# EAGLE board demeter_v23 (EAGLE 6.2)
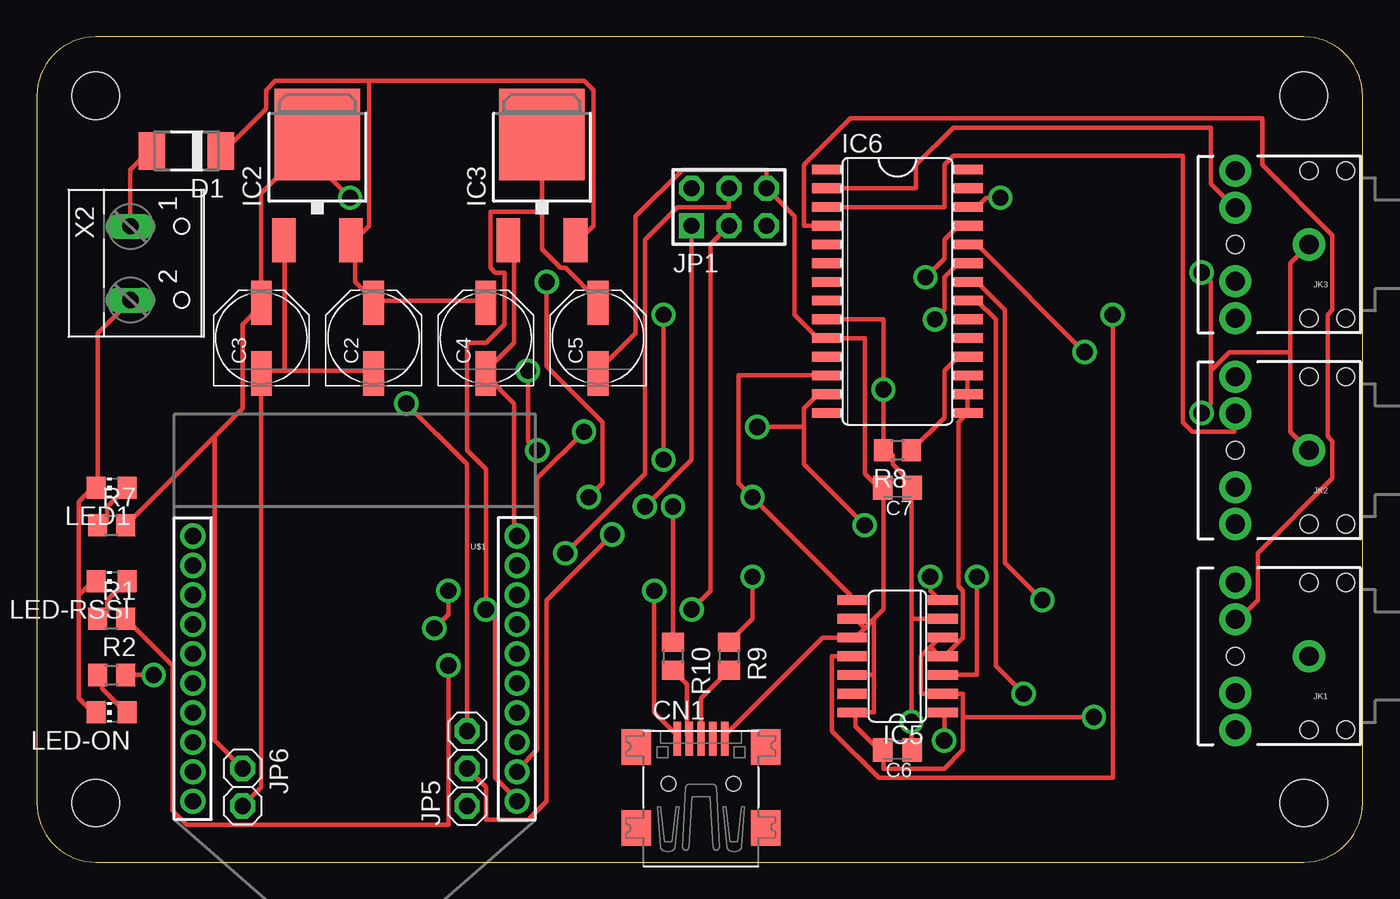
[diagram p0: board, top side]
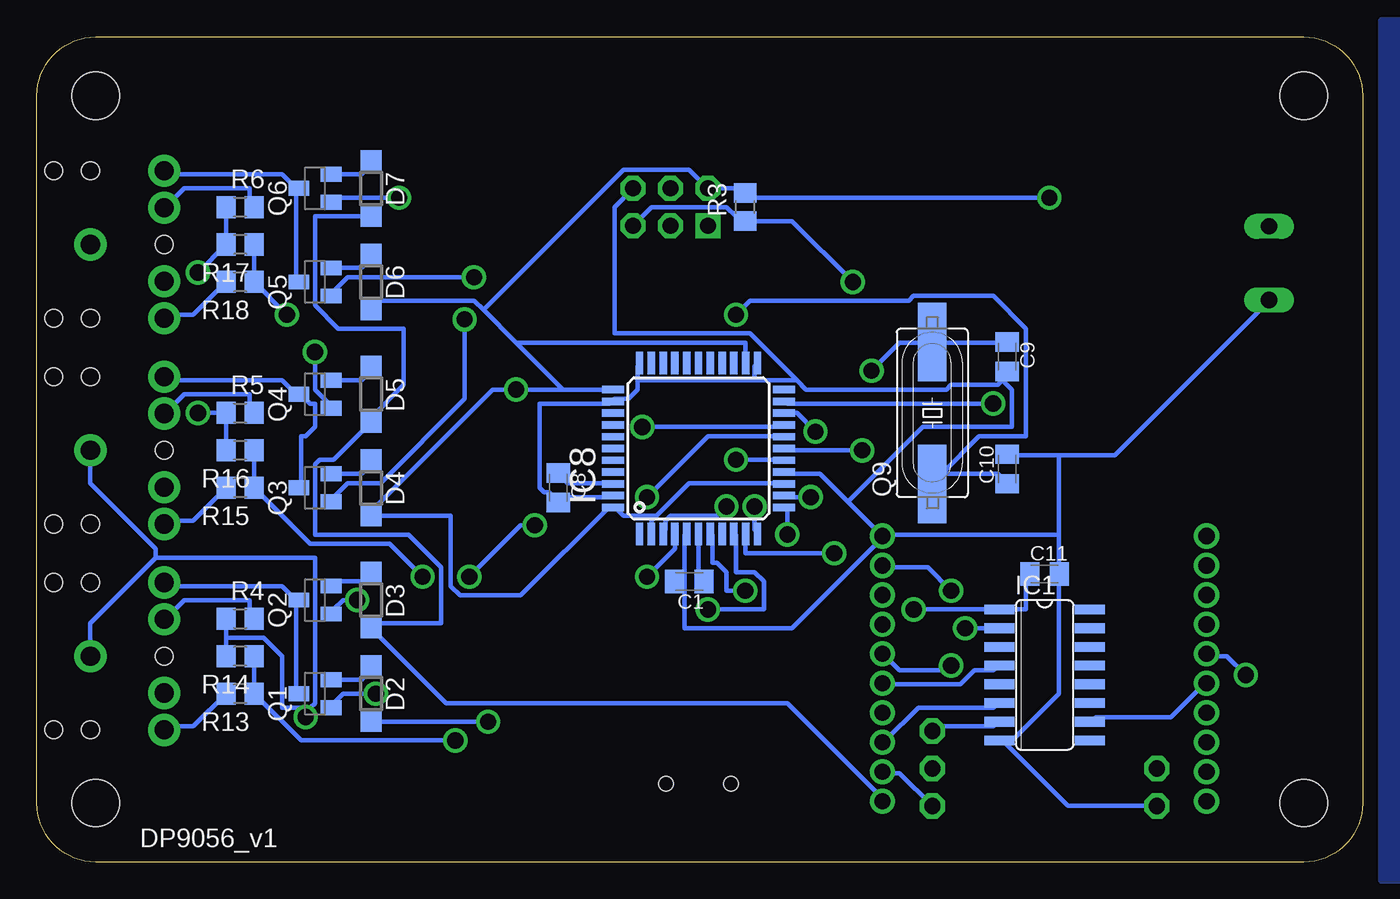
[diagram p1: board, bottom side, seen from below]

Size 90 x 56 mm. Coordinates in mm from the lower left corner, seen from the top.
Copper layers (1*16): Top 0.035mm / dielectric 1.5mm / Bottom 0.035mm
Design rules: minimum track width 12mil, minimum drill 1.1mm, track to track 8mil, track to pad 8mil, pad to pad 8mil, via to via 8mil, smd to smd 8mil, copper to edge 10mil, drill to drill 8mil, minimum pad ring 12mil, minimum via ring 10mil, stop-mask expansion 4mil, vias tented up to drill 25mil, thermal gap 10mil

## Footprints (pad centres in the part's own frame; a part is rotated, then mirrored left to right if it is on the bottom)
C0805K = smd 1.3 x 1.6: 1 -1,0; 2 1,0
PANASONIC_D = smd 3 x 1.4: + 2.4,0; - -2.4,0
USB-MINIB = smd 0.5 x 2.308: D+ 0,4.064; D- -0.8,4.064; GND 1.6,4.064; ID 0.8,4.064; VBUS -1.6,4.064 | smd 2 x 2.4: GND1 -4.4,-2; GND2 -4.4,3.5; GND3 4.4,3.5; GND4 4.4,-2 | hole 1: -2.2,1; 2.2,1
DO-214AC = smd 1.778 x 2.54: A 2.342,0; C -2.342,0
SOD123 = smd 1.4 x 1.4: A 1.9,0; C -1.9,0
SO16 = smd 0.66 x 2.032: 1 -4.445,-3.073; 2 -3.175,-3.073; 3 -1.905,-3.073; 4 -0.635,-3.073; 5 0.635,-3.073; 6 1.905,-3.073; 7 3.175,-3.073; 8 4.445,-3.073; 9 4.445,3.073; 10 3.175,3.073; 11 1.905,3.073; 12 0.635,3.073; 13 -0.635,3.073; 14 -1.905,3.073; 15 -3.175,3.073; 16 -4.445,3.073
DPACK = smd 1.6 x 3: 1 -2.28,-4.8; 3 2.28,-4.8 | smd 5.8 x 6.2: 4 0,2.38
SO14 = smd 2.032 x 0.66: 1 -3.073,3.81; 2 -3.073,2.54; 3 -3.073,1.27; 4 -3.073,0; 5 -3.073,-1.27; 6 -3.073,-2.54; 7 -3.073,-3.81; 8 3.073,-3.81; 9 3.073,-2.54; 10 3.073,-1.27; 11 3.073,0; 12 3.073,1.27; 13 3.073,2.54; 14 3.073,3.81
SO28W = smd 0.66 x 2.032: 1 -7.62,-4.78; 2 -6.35,-4.78; 3 -5.08,-4.78; 4 -3.81,-4.78; 5 -2.54,-4.78; 6 -1.27,-4.78; 7 0,-4.78; 8 1.27,-4.78; 9 2.54,-4.78; 10 3.81,-4.78; 11 5.08,-4.78; 12 6.35,-4.78; 13 7.62,-4.78; 14 8.89,-4.78; 15 8.89,4.78; 16 7.62,4.78; 17 6.35,4.78; 18 5.08,4.78; 19 3.81,4.78; 20 2.54,4.78; 21 1.27,4.78; 22 0,4.78; 23 -1.27,4.78; 24 -2.54,4.78; 25 -3.81,4.78; 26 -5.08,4.78; 27 -6.35,4.78; 28 -7.62,4.78
TQFP44 = smd 1.5 x 0.5: 1 -5.8,4; 2 -5.8,3.2; 3 -5.8,2.4; 4 -5.8,1.6; 5 -5.8,0.8; 6 -5.8,0; 7 -5.8,-0.8; 8 -5.8,-1.6; 9 -5.8,-2.4; 10 -5.8,-3.2; 11 -5.8,-4; 23 5.8,-4; 24 5.8,-3.2; 25 5.8,-2.4; 26 5.8,-1.6; 27 5.8,-0.8; 28 5.8,0; 29 5.8,0.8; 30 5.8,1.6; 31 5.8,2.4; 32 5.8,3.2; 33 5.8,4 | smd 0.5 x 1.5: 12 -4,-5.8; 13 -3.2,-5.8; 14 -2.4,-5.8; 15 -1.6,-5.8; 16 -0.8,-5.8; 17 0,-5.8; 18 0.8,-5.8; 19 1.6,-5.8; 20 2.4,-5.8; 21 3.2,-5.8; 22 4,-5.8; 34 4,5.8; 35 3.2,5.8; 36 2.4,5.8; 37 1.6,5.8; 38 0.8,5.8; 39 0,5.8; 40 -0.8,5.8; 41 -1.6,5.8; 42 -2.4,5.8; 43 -3.2,5.8; 44 -4,5.8
AUDIO-JACK = drill 1.3 pad 2.184: RING 5,5; RSH 5,2.5; SLEEVE 0,0; TIP 5,-5; TSH 5,-2.5 | hole 1.2: 0,5; -2.5,5; -2.5,-5; 0,-5; 5,0
AVR-ISP-6 = drill 1.1 square: 1 -2.54,-1.27 | drill 1.1 octagon: 2 -2.54,1.27; 3 0,-1.27; 4 0,1.27; 5 2.54,-1.27; 6 2.54,1.27
1X03 = drill 1.1 octagon: 1 -2.54,0; 2 0,0; 3 2.54,0
1X02 = drill 1.1 octagon: 1 -1.27,0; 2 1.27,0
CHIP-LED0805 = smd 1.5 x 1.3: A 0,-1.05; C 0,1.05
SOT23 = smd 1 x 1.4: 1 -0.95,-1.1; 2 0.95,-1.1; 3 0,1.1
HC49UP = smd 5.334 x 1.93: 1 -4.826,0; 2 4.826,0
R0805 = smd 1.3 x 1.5: 1 -0.95,0; 2 0.95,0
XBEE-1 = drill 1.1: 1 -11,20; 2 -11,18; 3 -11,16; 4 -11,14; 5 -11,12; 6 -11,10; 7 -11,8; 8 -11,6; 9 -11,4; 10 -11,2; 11 11,2; 12 11,4; 13 11,6; 14 11,8; 15 11,10; 16 11,12; 17 11,14; 18 11,16; 19 11,18; 20 11,20
DP9056_V1 = hole 3.2: 4,4; 86,4; 86,52; 4,52
W237-102 = drill 1.1 long: 1 -2.5,-1.27; 2 2.5,-1.27

## Placement (x,y rotation side)
C1  1uF  [C0805K]  45.72,19.05 180 bottom
C2  22uF  [PANASONIC_D]  22.86,35.56 90 top
C3  100uF  [PANASONIC_D]  15.24,35.56 90 top
C4  22uF  [PANASONIC_D]  30.48,35.56 90 top
C5  100uF  [PANASONIC_D]  38.1,35.56 90 top
C6  100nF  [C0805K]  58.42,7.62 180 top
C7  100nF  [C0805K]  58.42,25.4 180 top
C8  100nF  [C0805K]  54.61,25.4 270 bottom
C9  22pF  [C0805K]  24.13,34.29 270 bottom
C10  22pF  [C0805K]  24.13,26.67 90 bottom
C11  100nF  [C0805K]  21.59,19.56 0 bottom
CN1  [USB-MINIB]  45.08,4.32 0 top
D1  S1M  [DO-214AC]  10.16,48.26 180 top
D2  [SOD123]  67.31,11.43 270 bottom
D3  [SOD123]  67.31,17.78 270 bottom
D4  [SOD123]  67.31,25.4 270 bottom
D5  [SOD123]  67.31,31.75 270 bottom
D6  [SOD123]  67.31,39.37 270 bottom
D7  [SOD123]  67.31,45.72 270 bottom
IC1  4050  [SO16]  21.59,12.7 270 bottom
IC2  LM1117-5.0  [DPACK]  19.05,46.99 0 top
IC3  LM1117-3.3  [DPACK]  34.29,46.99 0 top
IC5  MCP3424  [SO14]  58.42,13.97 180 top
IC6  MCP23017SO  [SO28W]  58.42,39.37 270 top
IC8  ATMEGA32U4-AU  [TQFP44]  45.08,28.07 90 bottom
JK1  [AUDIO-JACK]  86.36,13.97 180 top
JK2  [AUDIO-JACK]  86.36,27.94 180 top
JK3  [AUDIO-JACK]  86.36,41.91 180 top
JP1  AVR-ISP-6  [AVR-ISP-6]  46.99,44.45 0 top
JP5  [1X03]  29.21,6.35 90 top
JP6  [1X02]  13.97,5.08 270 top
LED1  [CHIP-LED0805]  5.08,25.4 90 top
LED-ON  [CHIP-LED0805]  5.08,10.16 90 top
LED-RSSI  [CHIP-LED0805]  5.08,19.05 90 top
Q1  IRLML6402  [SOT23]  71.12,11.43 90 bottom
Q2  [SOT23]  71.12,17.78 90 bottom
Q3  IRLML6402  [SOT23]  71.12,25.4 90 bottom
Q4  [SOT23]  71.12,31.75 90 bottom
Q5  IRLML6402  [SOT23]  71.12,39.37 90 bottom
Q6  [SOT23]  71.12,45.72 90 bottom
Q9  [HC49UP]  29.21,30.48 90 bottom
R1  [R0805]  5.08,16.51 0 top
R2  [R0805]  5.08,12.7 0 top
R3  [R0805]  41.91,44.45 90 bottom
R4  [R0805]  76.2,16.51 0 bottom
R5  [R0805]  76.2,30.48 0 bottom
R6  [R0805]  76.2,44.45 0 bottom
R7  [R0805]  5.08,22.86 0 top
R8  [R0805]  58.42,27.94 180 top
R9  22  [R0805]  46.99,13.97 270 top
R10  22  [R0805]  43.18,13.97 270 top
R13  [R0805]  76.2,11.43 180 bottom
R14  [R0805]  76.2,13.97 180 bottom
R15  [R0805]  76.2,25.4 180 bottom
R16  [R0805]  76.2,27.94 180 bottom
R17  [R0805]  76.2,41.91 180 bottom
R18  [R0805]  76.2,39.37 180 bottom
U$1  XBEE-1B1  [XBEE-1]  21.59,24.13 180 top
U$6  [DP9056_V1]  0,0 0 top
X2  [W237-102]  7.62,40.64 270 top

## Library data of the parts
C1-C11 CN1 D1-D7 IC1-IC3 IC8 JK1-JK3 JP1 JP5 JP6 LED1 LED-ON LED-RSSI Q1-Q6 Q9 R1-R10 R13-R18 U$1 U$6 X2 = mark_2
IC5 = mark_2; MPN: MCP3424-E/SL; OC_FARNELL: 1630424; OC_NEWARK: 54M4871; PACKAGE: SOIC-14; SUPPLIER: Microchip
IC6 = mark_2; MF: MICROCHIP; MPN: MCP23017-E/SO; OC_FARNELL: 1332087; OC_NEWARK: 31K2958

## Nets
+3V3: C5.+ C11.1 D3.A D5.A D7.A IC1.1 IC3.4 U$1.1
+5V: C3.+ C6.1 C7.1 D2.A D4.A D6.A IC2.4 IC5.6 IC6.9 IC8.2 IC8.14 IC8.24 IC8.34 IC8.44 JP1.2 JP6.1 R3.2 R7.2 R8.2
+12V: C2.+ C4.+ D1.C IC2.3 IC3.3
CH1: IC5.1 R13.1 R14.1
CH2: IC5.3 R15.1 R16.1
CH3: IC5.11 R17.1 R18.1
CH4: IC5.13
CTS: U$1.12
D+: IC8.4 R9.1
D-: IC8.3 R10.1
DTR: IC1.3
EN: IC8.12 JP5.2
EN1-3: IC6.22 Q2.1
EN1-5: IC6.21 Q1.1
EN2-3: IC6.24 Q4.1
EN2-5: IC6.23 Q3.1
EN3-3: IC6.26 Q6.1
EN3-5: IC6.25 Q5.1
GND: C1.2 C2.- C3.- C4.- C5.- C6.2 C7.2 C8.2 C9.2 C10.2 C11.2 CN1.GND IC1.8 IC2.1 IC3.1 IC5.2 IC5.4 IC5.5 IC5.9 IC5.10 IC5.12 IC5.14 IC6.10 IC6.15 IC6.16 IC6.17 IC8.5 IC8.15 IC8.23 IC8.33 IC8.35 IC8.43 JK1.SLEEVE JK2.SLEEVE JK3.SLEEVE JP1.6 JP6.2 LED1.C LED-ON.C LED-RSSI.C R4.1 R5.1 R6.1 R14.2 R16.2 R17.2 U$1.10 X2.2
MISO: IC8.11 JP1.1
MOSI: IC8.10 JP1.4
N$1: D1.A X2.1
N$2: LED1.A R7.1
N$3: IC1.6 U$1.3
N$4: IC1.4 U$1.5
N$6: LED-RSSI.A R1.1
N$7: IC1.2 U$1.9
N$8: IC1.10 U$1.16
N$9: LED-ON.A R2.1
N$10: R2.2 U$1.15
N$11: IC6.18 R8.1
N$12: JK1.TIP Q1.3 Q2.3
N$13: D2.C Q1.2
N$14: D3.C Q2.2
N$15: JK2.TIP Q3.3 Q4.3
N$16: D4.C Q3.2
N$17: D5.C Q4.2
N$18: JK3.TIP Q5.3 Q6.3
N$19: D6.C Q5.2
N$20: D7.C Q6.2
N$24: C1.1 IC8.6
N$25: C8.1 IC8.42
N$26: C9.1 IC8.17 Q9.2
N$27: C10.1 IC8.16 Q9.1
N$28: CN1.D+ R9.2
N$29: CN1.D- R10.2
N$30: JK1.RING R13.2
N$32: JK2.RING R15.2
N$34: JK3.RING R18.2
RESET: IC1.5
RSSI: R1.2 U$1.6
RST: IC8.13 JP1.5 R3.1
RTS: IC1.9
RX: IC8.20 JP5.1 U$1.2
SCK: IC8.9 JP1.3
SCL: IC5.8 IC6.12 IC8.18
SDA: IC5.7 IC6.13 IC8.19
SN1: IC6.4 JK1.TSH R4.2
SN2: IC6.3 JK2.TSH R5.2
SN3: IC6.2 JK3.TSH R6.2
TX: IC1.7 IC8.21 JP5.3
VBUS: CN1.VBUS IC8.7

## Tracks (layer width: path | path; a pad name or v marks a point on that pad's centre or on a via)
+3V3  (via drill 1.1)
  Top 0.305: IC3.4 34.29,44.13 | 34.29,44.13 34.29,41.59 35.56,40.32 35.88,40.32 38.1,38.1 C5.+ | U$1.1 32.38,4.45 31.11,5.71 31.11,16.51 v30.48,17.14 30.48,26.67 29.21,27.94 29.21,35.24 30.48,35.24 31.75,36.51 31.75,40 31.11,40 30.8,40.32 30.8,44.13 34.29,44.13
  Bottom 0.305: D7.A 71.12,43.81 71.12,37.78 69.53,36.2 65.09,36.2 65.09,32.38 67.31,30.16 D5.A 69.85,27.3 70.8,27.3 71.12,26.99 71.12,22.23 64.77,22.23 62.55,20 62.55,16.19 67.31,16.19 D3.A 62.23,10.79 39.05,10.79 32.7,4.45 U$1.1 | C11.1 22.86,19.37 22.86,17.14 IC1.1 v30.48,17.14
+5V  (via drill 1.1)
  Top 0.305: 12.07,28.89 13.97,30.8 13.97,36.51 15.24,37.78 C3.+ 15.24,45.4 18.1,48.26 | 12.07,28.89 R7.2 | JP6.1 12.07,8.26 12.07,28.89 | 18.1,48.26 19.05,49.21 IC2.4 18.1,48.26 | C6.1 59.37,7.62 v59.37,9.53 59.37,16.51 | 59.37,16.51 IC5.6 | 59.37,25.4 59.37,25.72 58.1,26.99 58.1,27.62 57.78,27.94 R8.2 v57.47,32.07 57.47,36.83 IC6.9 | 59.37,25.4 59.37,16.51 | 59.37,25.4 C7.1 | v21.27,45.08 18.1,48.26
  Bottom 0.305: v59.37,9.53 D2.A | 47.94,23.5 48.26,23.18 48.26,22.54 IC8.2 | 47.94,23.5 45.72,25.72 39.37,25.72 IC8.14 | 47.94,23.5 50.16,23.5 50.8,24.13 IC8.44 51.12,24.13 57.15,18.1 61.28,18.1 61.91,18.73 61.91,23.5 D4.A 67.31,23.81 59.05,32.07 v57.47,32.07 54.29,32.07 | 54.29,32.07 51.12,32.07 IC8.34 | 54.29,32.07 57.47,35.24 | 57.47,35.24 59.69,37.46 | 59.69,37.46 60.32,38.1 66.99,38.1 67.31,37.78 D6.A | 57.47,35.24 41.91,35.24 41.91,33.97 IC8.24 | 59.69,37.46 50.16,46.99 45.72,46.99 JP1.2 42.23,45.72 R3.2 41.91,45.08 v21.27,45.08
+12V
  Top 0.305: 22.54,53.02 16.19,53.02 15.56,52.39 15.56,51.12 12.7,48.26 D1.C | 22.54,53.02 22.54,43.18 21.59,42.23 IC2.3 21.59,41.91 21.59,39.37 22.86,38.1 | 22.86,38.1 30.48,38.1 C4.+ | 22.86,38.1 C2.+ | 22.54,53.02 37.15,53.02 37.78,52.39 37.78,43.18 36.83,42.23 IC3.3
CH1  (via drill 1.1)
  Top 0.305: v61.59,8.26 61.59,10.16 IC5.1
  Bottom 0.305: R13.1 R14.1 | v61.59,8.26 72.07,8.26 R13.1 | R13.1
CH2  (via drill 1.1)
  Top 0.305: IC5.3 63.82,12.7 v63.82,19.37
  Bottom 0.305: R15.1 R16.1 | v63.82,19.37 66.04,21.59 71.44,21.59 R15.1 | R15.1
CH3  (via drill 1.1)
  Top 0.305: IC5.11 53.97,13.97 53.97,8.89 57.15,5.71 73.03,5.71 v73.03,37.15
  Bottom 0.305: R18.1 R17.1 | R18.1 v73.03,37.15 | R18.1
D+  (via drill 1.1)
  Top 0.305: v48.58,19.37 48.58,16.51 R9.1
  Bottom 0.305: v48.58,19.37 46.67,21.27 46.67,22.23 IC8.4
D-  (via drill 1.1)
  Top 0.305: v43.18,24.13 R10.1
  Bottom 0.305: v43.18,24.13 43.81,23.5 46.99,23.5 47.31,23.18 47.31,22.54 IC8.3
EN  (via drill 1.1)
  Top 0.305: v39.05,22.23 34.61,17.78 34.61,4.13 33.34,2.86 30.48,2.86 30.48,5.08 JP5.2
  Bottom 0.305: v39.05,22.23 39.05,24.13 IC8.12
EN1-3  (via drill 1.1)
  Top 0.305: v68.26,17.78 65.72,20.32 65.72,37.46 63.82,39.37 IC6.22
  Bottom 0.305: v68.26,17.78 69.22,17.78 69.85,17.14 Q2.1
EN1-5  (via drill 1.1)
  Top 0.305: v66.99,11.43 65.09,13.34 65.09,36.83 63.82,38.1 IC6.21
  Bottom 0.305: v66.99,11.43 69.22,11.43 69.85,10.79 Q1.1
EN2-3  (via drill 1.1)
  Top 0.305: v71.12,34.61 63.82,41.91 IC6.24
  Bottom 0.305: v71.12,34.61 71.12,32.07 70.17,31.11 Q4.1
EN2-5  (via drill 1.1)
  Top 0.305: v60.96,36.83 61.59,37.46 61.59,39.69 62.55,40.64 IC6.23
  Bottom 0.305: v60.96,36.83 60.96,31.43 66.67,25.72 68.9,25.72 69.85,24.77 Q3.1
EN3-3  (via drill 1.1)
  Top 0.305: v65.41,45.08 64.45,45.08 63.82,44.45 IC6.26
  Bottom 0.305: v65.41,45.08 69.85,45.08 Q6.1
EN3-5  (via drill 1.1)
  Top 0.305: v60.32,39.69 61.59,40.96 61.59,42.23 62.55,43.18 IC6.25
  Bottom 0.305: v60.32,39.69 68.9,39.69 69.85,38.73 Q5.1
GND  (via drill 1.1)
  Top 0.305: v79.06,30.48 79.69,31.11 79.69,33.34 | 79.69,33.34 80.96,34.61 85.09,34.61 | 85.09,34.61 85.09,29.21 JK2.SLEEVE | v79.06,40 79.69,39.37 79.69,33.34 | JK3.SLEEVE 85.09,40.64 85.09,34.61 | C5.- 38.1,33.34 40.64,35.88 40.64,43.81 43.81,46.99 49.53,46.99 JP1.6 51.43,43.81 51.43,37.15 53.02,35.56 IC6.10 56.2,35.56 56.2,26.35 57.15,25.4 C7.2 57.47,25.4 57.47,17.14 56.83,16.51 | 63.18,31.75 63.18,30.48 | 63.18,31.75 63.18,33.02 IC6.17 | 63.18,31.75 IC6.16 | 60.64,14.61 61.28,15.24 IC5.5 | 60.64,14.61 60.01,13.97 60.01,11.43 IC5.2 62.87,11.43 62.87,9.84 | 60.64,14.61 61.28,13.97 IC5.4 61.59,13.97 62.87,15.24 62.87,18.41 62.55,18.73 62.55,29.84 63.18,30.48 | 63.18,30.48 IC6.15 | 55.56,10.16 55.56,9.21 57.15,7.62 C6.2 57.47,7.62 57.47,6.35 61.59,6.35 62.87,7.62 62.87,9.84 | 56.2,15.88 55.56,15.24 IC5.10 53.34,15.24 46.67,8.57 CN1.GND | 56.2,15.88 56.83,16.51 | 56.83,12.7 IC5.12 | 56.83,16.51 56.83,12.7 | 56.2,15.88 55.56,16.51 IC5.9 | 55.56,10.16 56.83,10.16 56.83,12.7 | 55.56,10.16 IC5.14 | 62.87,9.84 v71.76,9.84 | 2.86,18.1 2.86,11.11 3.81,10.16 LED-ON.C | 2.86,18.1 3.81,19.05 LED-RSSI.C | 2.86,18.1 2.86,24.45 3.81,25.4 LED1.C 4.13,25.4 4.13,35.88 6.35,38.1 X2.2 | 16.83,33.34 22.86,33.34 C2.- | 16.83,33.34 15.24,33.34 C3.- 15.24,5.08 JP6.2 | 16.83,33.34 16.83,41.91 IC2.1 | U$1.10 32.38,22.23 32.38,31.11 30.48,33.02 C4.- 30.48,33.34 32.38,35.24 32.38,41.59 32.07,41.91 IC3.1
  Bottom 0.305: 77.15,15.24 R4.1 | 77.15,15.24 R14.2 | 77.15,15.24 74.61,15.24 73.34,13.97 73.34,10.48 71.76,10.48 | 71.76,10.48 71.44,10.48 71.12,10.79 71.12,20.64 81.92,20.64 | 81.92,20.64 86.36,16.19 JK1.SLEEVE | R17.2 R6.1 | R5.1 R16.2 | v79.06,30.48 R5.1 | R5.1 | v79.06,40 R17.2 | R17.2 | 81.92,20.64 81.92,21.27 86.36,25.72 JK2.SLEEVE | v71.76,9.84 71.76,10.48 | 54.61,24.45 54.29,24.77 51.12,24.77 IC8.43 | 49.21,32.7 49.21,33.65 IC8.33 | 49.21,32.7 49.21,32.07 49.85,31.43 50.8,31.43 IC8.35 51.12,31.11 55.88,31.11 55.88,25.4 55.56,25.08 55.24,25.08 54.61,24.45 | 41.27,32.7 41.27,33.65 IC8.23 | 49.21,32.7 41.27,32.7 | 24.45,32.7 24.77,32.38 27.94,32.38 28.26,32.07 37.78,32.07 38.42,32.7 | 24.45,32.7 24.13,33.02 C9.2 24.45,32.7 | 41.27,32.7 38.42,32.7 | 54.61,24.45 C8.2 | 24.13,7.94 20,3.81 JP6.2 | 24.13,7.94 24.45,8.26 IC1.8 24.13,7.94 | 20.64,27.62 20.64,22.23 | 20.64,22.23 20.64,19.68 C11.2 20.64,19.37 20.64,11.43 24.13,7.94 | 20.64,27.62 24.13,27.62 C10.2 | 46.04,19.05 46.04,22.23 IC8.5 | C1.2 46.04,19.05 | 34.92,24.45 32.7,22.23 U$1.10 | 34.92,24.45 36.83,26.35 39.05,26.35 IC8.15 | 46.04,19.05 46.04,15.88 38.73,15.88 32.7,21.91 U$1.10 | 20.64,22.23 32.38,22.23 U$1.10 | 20.64,27.62 16.83,27.62 6.35,38.1 X2.2 | 24.45,32.7 23.81,32.07 23.81,29.53 29.84,29.53 34.92,24.45 | JP1.6 50.8,44.45 50.8,35.88 41.59,35.88 38.42,32.7
  pour Bottom (isolate 0.813): -1.27,57.15 -10.16,57.15 -10.16,-1.27 -1.27,-1.27
MISO  (via drill 1.1)
  Top 0.305: v41.27,24.13 44.45,27.3 JP1.1
  Bottom 0.305: v41.27,24.13 41.27,22.54 IC8.11
MOSI  (via drill 1.1)
  Top 0.305: v35.88,20.96 41.27,26.35 41.27,42.23 43.5,44.45 46.99,44.45 JP1.4
  Bottom 0.305: v35.88,20.96 41.91,20.96 41.91,22.23 IC8.10
N$1
  Top 0.305: X2.1 6.35,46.99 7.62,48.26 D1.A
N$2
  Top 0.305: R7.1 4.45,22.86 4.76,23.18 4.76,24.13 6.03,25.4 LED1.A
N$3
  Bottom 0.305: IC1.6 24.77,10.79 25.08,10.48 30.16,10.48 32.38,8.26 U$1.3
N$4
  Bottom 0.305: IC1.4 24.77,13.34 25.08,13.02 26.35,13.02 27.3,12.07 32.38,12.07 U$1.5
N$6
  Top 0.305: R1.1 4.45,16.51 4.76,16.83 4.76,17.78 6.03,19.05 LED-RSSI.A
N$7  (via drill 1.1)
  Top 0.305: v26.99,15.88 27.94,16.83 v27.94,18.41
  Bottom 0.305: v26.99,15.88 IC1.2 | v27.94,18.41 29.53,20 32.38,20 U$1.9
N$8
  Bottom 0.305: IC1.10 18.41,9.53 18.1,9.84 13.02,9.84 10.79,12.07 U$1.16
N$9
  Top 0.305: LED-ON.A 6.03,10.16 4.45,11.75 4.45,12.7 R2.1
N$10  (via drill 1.1)
  Top 0.305: v7.94,12.7 R2.2
  Bottom 0.305: v7.94,12.7 9.21,13.97 10.48,13.97 U$1.15
N$11
  Top 0.305: IC6.18 62.55,34.29 61.59,33.34 61.59,30.16 R8.1
N$12
  Bottom 0.305: 72.39,17.78 72.39,11.43 Q1.3 | 72.39,17.78 73.34,18.73 81.28,18.73 JK1.TIP | 72.39,17.78 Q2.3
N$13
  Bottom 0.305: D2.C 67.31,13.02 67.95,12.38 69.85,12.38 Q1.2
N$14
  Bottom 0.305: D3.C 67.31,19.37 67.63,19.05 69.53,19.05 69.85,18.73 Q2.2
N$15
  Bottom 0.305: Q3.3 72.07,25.4 72.07,28.89 71.76,28.89 71.12,29.53 71.12,31.11 71.44,31.11 72.07,31.75 Q4.3 72.39,31.75 73.34,32.7 81.28,32.7 JK2.TIP
N$16
  Bottom 0.305: D4.C 67.31,26.99 67.95,26.35 69.85,26.35 Q3.2
N$17
  Bottom 0.305: D5.C 67.31,33.34 67.95,32.7 69.85,32.7 Q4.2
N$18
  Bottom 0.305: 72.39,45.72 72.39,39.37 Q5.3 | 72.39,45.72 73.34,46.67 81.28,46.67 JK3.TIP | 72.39,45.72 Q6.3
N$19
  Bottom 0.305: D6.C 67.31,40.96 67.95,40.32 69.85,40.32 Q5.2
N$20
  Bottom 0.305: D7.C 67.31,47.31 67.95,46.67 69.85,46.67 Q6.2
N$24
  Bottom 0.305: IC8.6 45.08,19.05 C1.1
N$25
  Bottom 0.305: IC8.42 51.12,25.72 53.97,25.72 54.61,26.35 C8.1
N$26  (via drill 1.1)
  Top 0.305: v33.97,27.94 33.34,28.57 v33.34,33.34
  Bottom 0.305: v33.97,27.94 39.05,27.94 IC8.17 | v33.34,33.34 31.43,35.24 29.21,35.24 | 29.21,35.24 24.13,35.24 C9.1 | 29.21,35.24 Q9.2
N$27  (via drill 1.1)
  Top 0.305: v42.54,37.15 v42.54,27.3
  Bottom 0.305: v42.54,27.3 39.37,27.3 IC8.16 | v42.54,37.15 41.59,38.1 30.8,38.1 30.48,38.42 25.08,38.42 22.86,36.2 22.86,28.89 26.04,28.89 28.57,26.35 | 28.57,26.35 29.21,25.72 Q9.1 28.57,26.35 | 28.57,26.35 24.77,26.35 24.13,25.72 C10.1
N$28
  Top 0.305: CN1.D+ 45.08,11.11 R9.2
N$29
  Top 0.305: R10.2 44.13,12.07 44.13,8.57 CN1.D-
N$30
  Bottom 0.305: R13.2 79.38,9.21 81.28,9.21 JK1.RING
N$32
  Bottom 0.305: R15.2 79.38,23.18 81.28,23.18 JK2.RING
N$34
  Bottom 0.305: R18.2 79.38,37.15 81.28,37.15 JK3.RING
RSSI  (via drill 1.1)
  Top 0.305: v27.94,13.34 27.94,2.54 10.16,2.54 9.21,3.49 9.21,13.34 R1.2
  Bottom 0.305: v27.94,13.34 28.26,13.02 31.43,13.02 32.38,13.97 U$1.6
RST  (via drill 1.1)
  Top 0.305: v37.46,24.77 38.42,25.72 38.42,29.84 34.61,33.65 v34.61,39.37
  Bottom 0.305: v37.46,24.77 39.05,24.77 IC8.13 | v34.61,39.37 38.73,43.5 R3.1 41.91,43.81 42.54,43.81 43.18,44.45 48.26,44.45 JP1.5
RX  (via drill 1.1)
  Top 0.305: v37.15,29.21 33.97,26.04 33.97,7.62 32.7,6.35 U$1.2
  Bottom 0.305: v37.15,29.21 38.42,30.48 39.05,30.48 IC8.20 | JP5.1 31.43,6.03 32.38,6.03 U$1.2
SCK  (via drill 1.1)
  Top 0.305: v44.45,17.14 45.72,18.41 45.72,41.91 JP1.3
  Bottom 0.305: v44.45,17.14 40.64,17.14 40.64,19.05 41.27,19.68 42.54,19.68 42.54,22.23 IC8.9
SCL  (via drill 1.1)
  Top 0.305: IC5.8 55.24,17.78 55.24,18.1 v48.58,24.77 47.62,25.72 47.62,33.02 IC6.12
  Bottom 0.305: v48.58,24.77 44.45,28.89 39.37,28.89 IC8.18
SDA  (via drill 1.1)
  Top 0.305: 52.07,29.53 v48.89,29.53 | 52.07,29.53 52.07,30.8 53.02,31.75 IC6.13 | v60.64,19.37 60.64,18.41 61.28,17.78 IC5.7 | v56.2,22.86 52.07,26.99 52.07,29.53
  Bottom 0.305: v48.89,29.53 39.37,29.53 IC8.19 | v60.64,19.37 57.15,22.86 v56.2,22.86
SN1
  Top 0.305: IC6.4 52.07,43.18 52.07,47.31 55.24,50.48 83.19,50.48 83.19,47.31 87.95,42.54 87.95,37.46 87.63,37.15 87.63,28.89 87.95,28.57 87.95,26.04 82.87,20.96 82.87,17.78 81.6,16.51 JK1.TSH
  Bottom 0.305: R4.2 75.56,16.51 75.56,17.78 80.01,17.78 81.28,16.51 JK1.TSH
SN2
  Top 0.305: IC6.3 61.59,44.45 61.59,47.31 62.23,47.94 77.79,47.94 77.79,29.84 78.42,29.21 81.28,29.21 81.28,30.16 JK2.TSH
  Bottom 0.305: R5.2 75.56,30.48 75.56,31.75 80.01,31.75 81.28,30.48 JK2.TSH
SN3
  Top 0.305: IC6.2 59.69,45.72 59.69,47.31 62.23,49.85 79.69,49.85 79.69,46.04 81.28,44.45 JK3.TSH
  Bottom 0.305: R6.2 75.56,44.45 75.56,45.72 80.01,45.72 81.28,44.45 JK3.TSH
TX  (via drill 1.1)
  Top 0.305: v25.08,31.11 29.21,26.99 JP5.3
  Bottom 0.305: v25.08,31.11 39.05,31.11 IC8.21 | JP5.3 28.89,9.21 25.08,9.21 24.77,9.53 IC1.7
VBUS  (via drill 1.1)
  Top 0.305: v41.91,18.41 41.91,10.16 43.5,8.57 CN1.VBUS
  Bottom 0.305: v41.91,18.41 43.18,18.41 43.18,19.68 43.81,20.32 44.13,20.32 44.13,22.23 IC8.7